# Altium PCB MB672.PCBDOC (part 1 of 4)
Units mil, origin at the board's own origin, x right, y up, seen from the top; angles counter-clockwise.
Board outline 4505 x 6805 mil, 4 copper layers (TopLayer, GND, VCC, BottomLayer); 337 components, 289 nets, 1516 pads, 621 vias.
Unrouted connection lines stored in the file: 28.
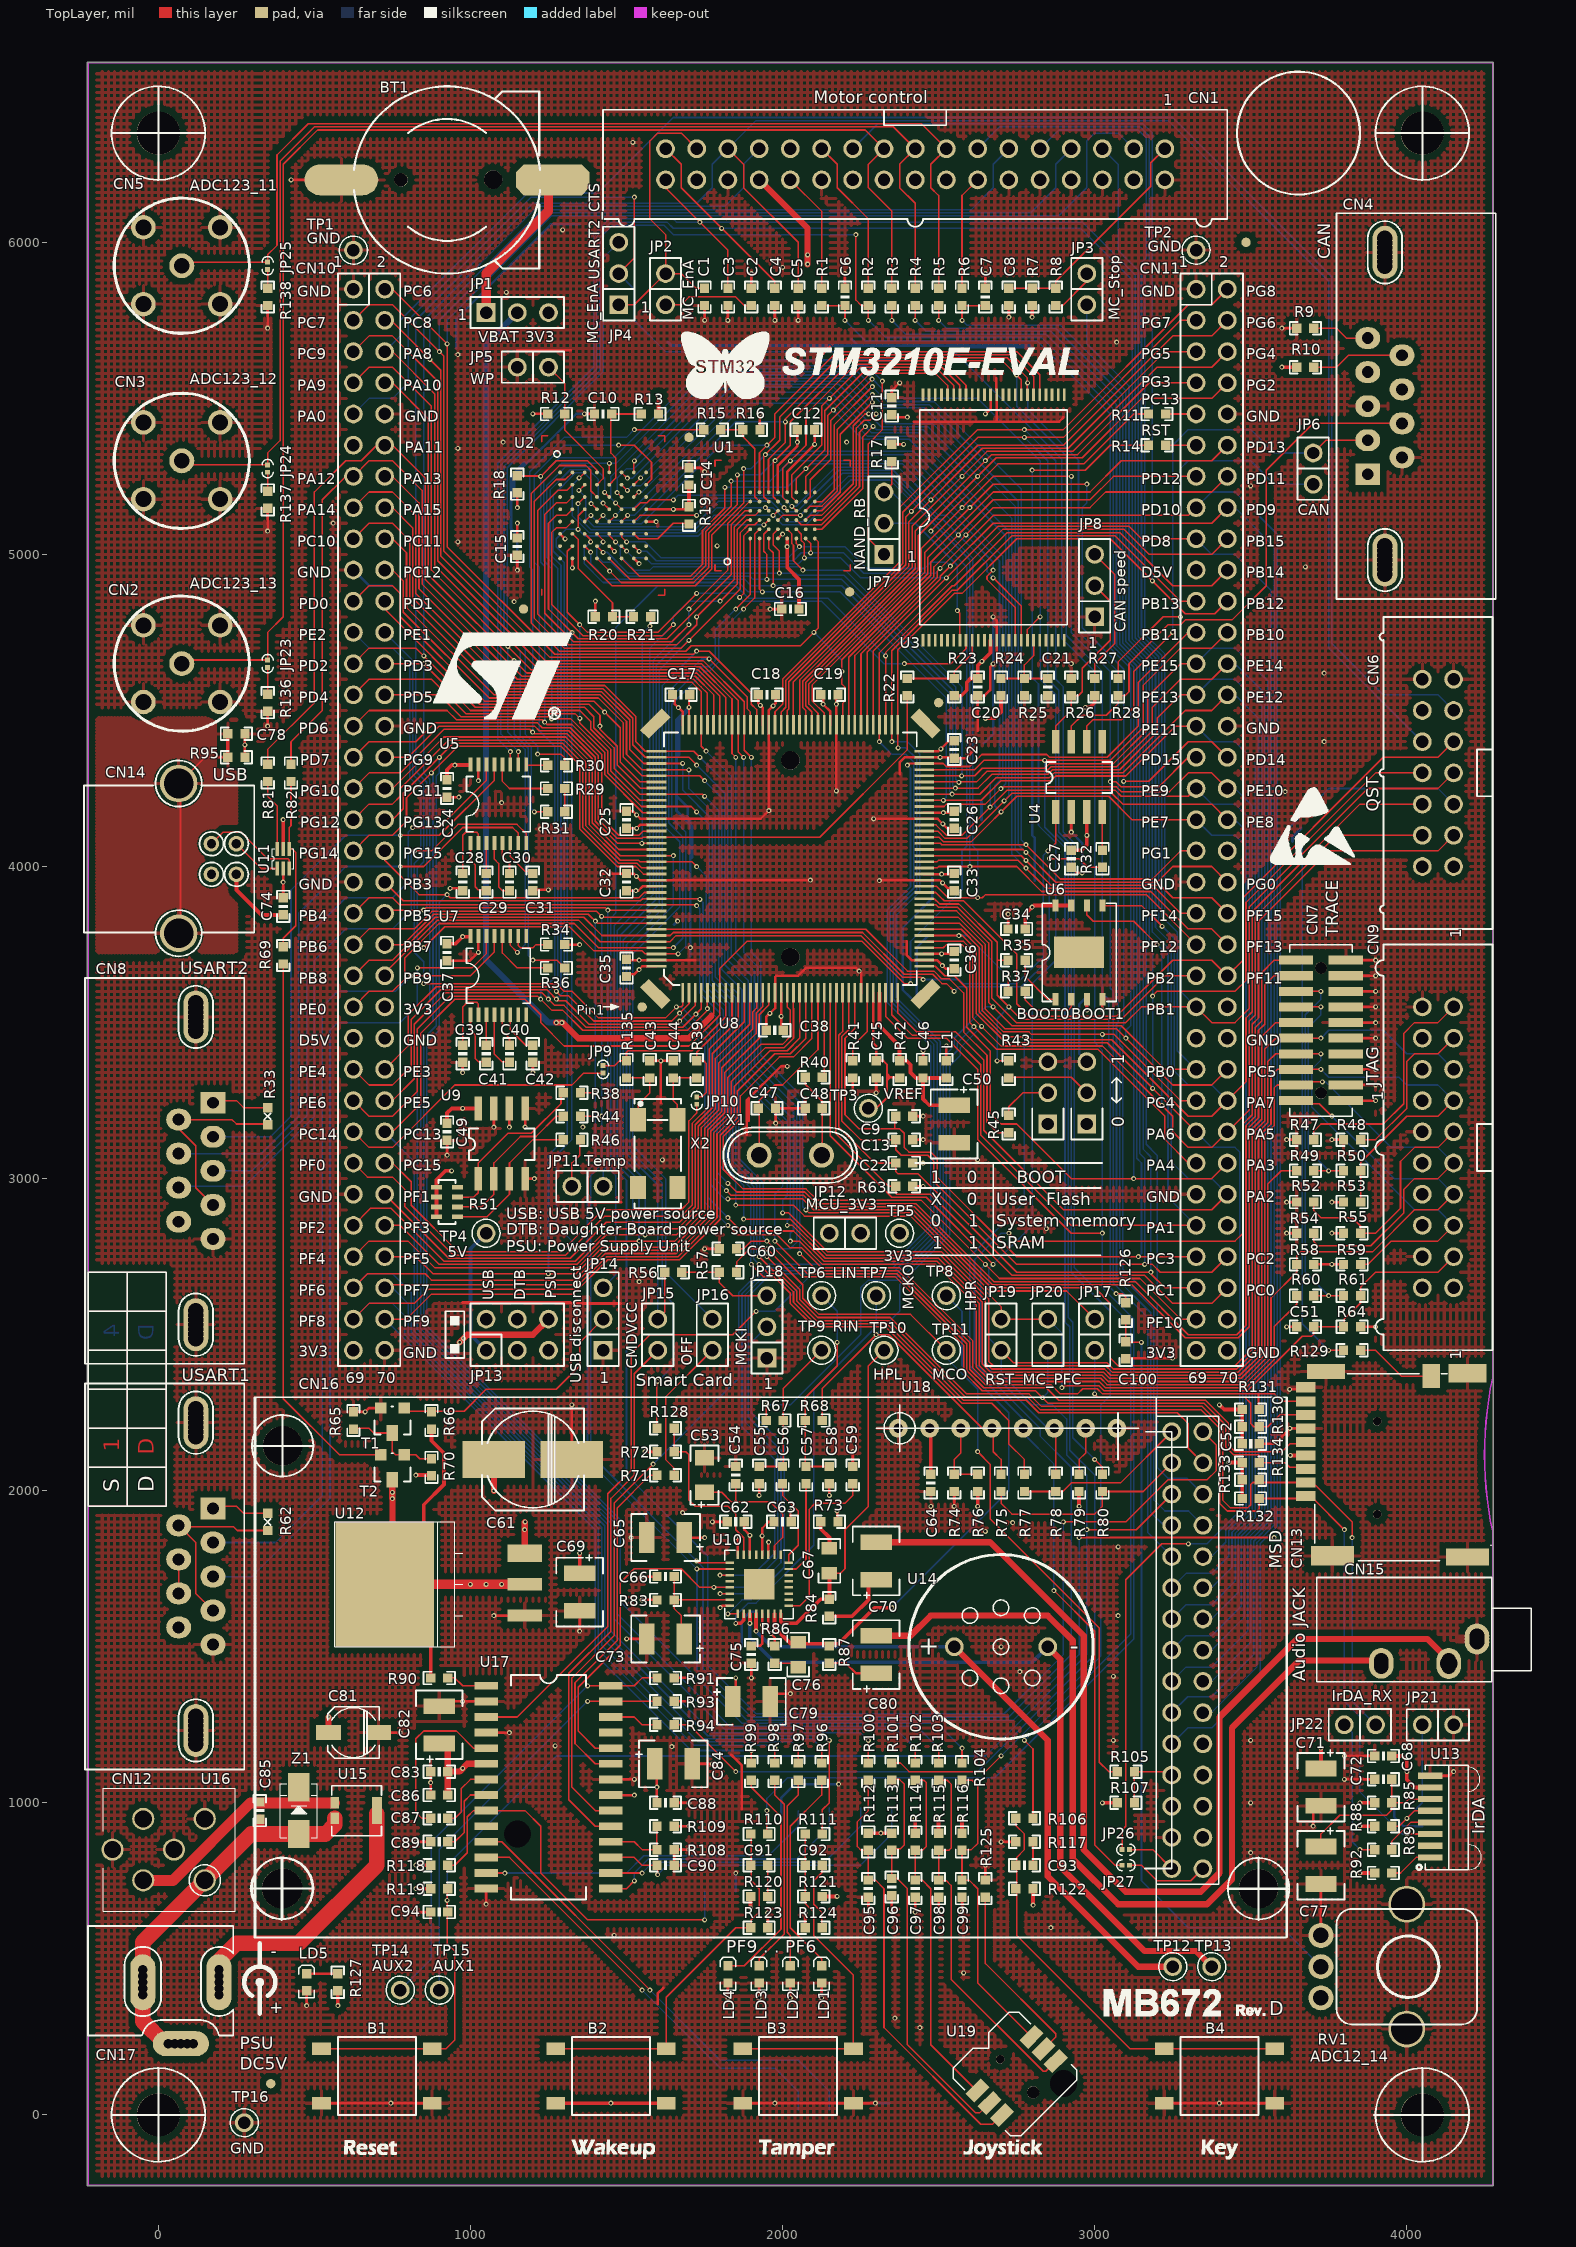
[diagram p0: TopLayer view]
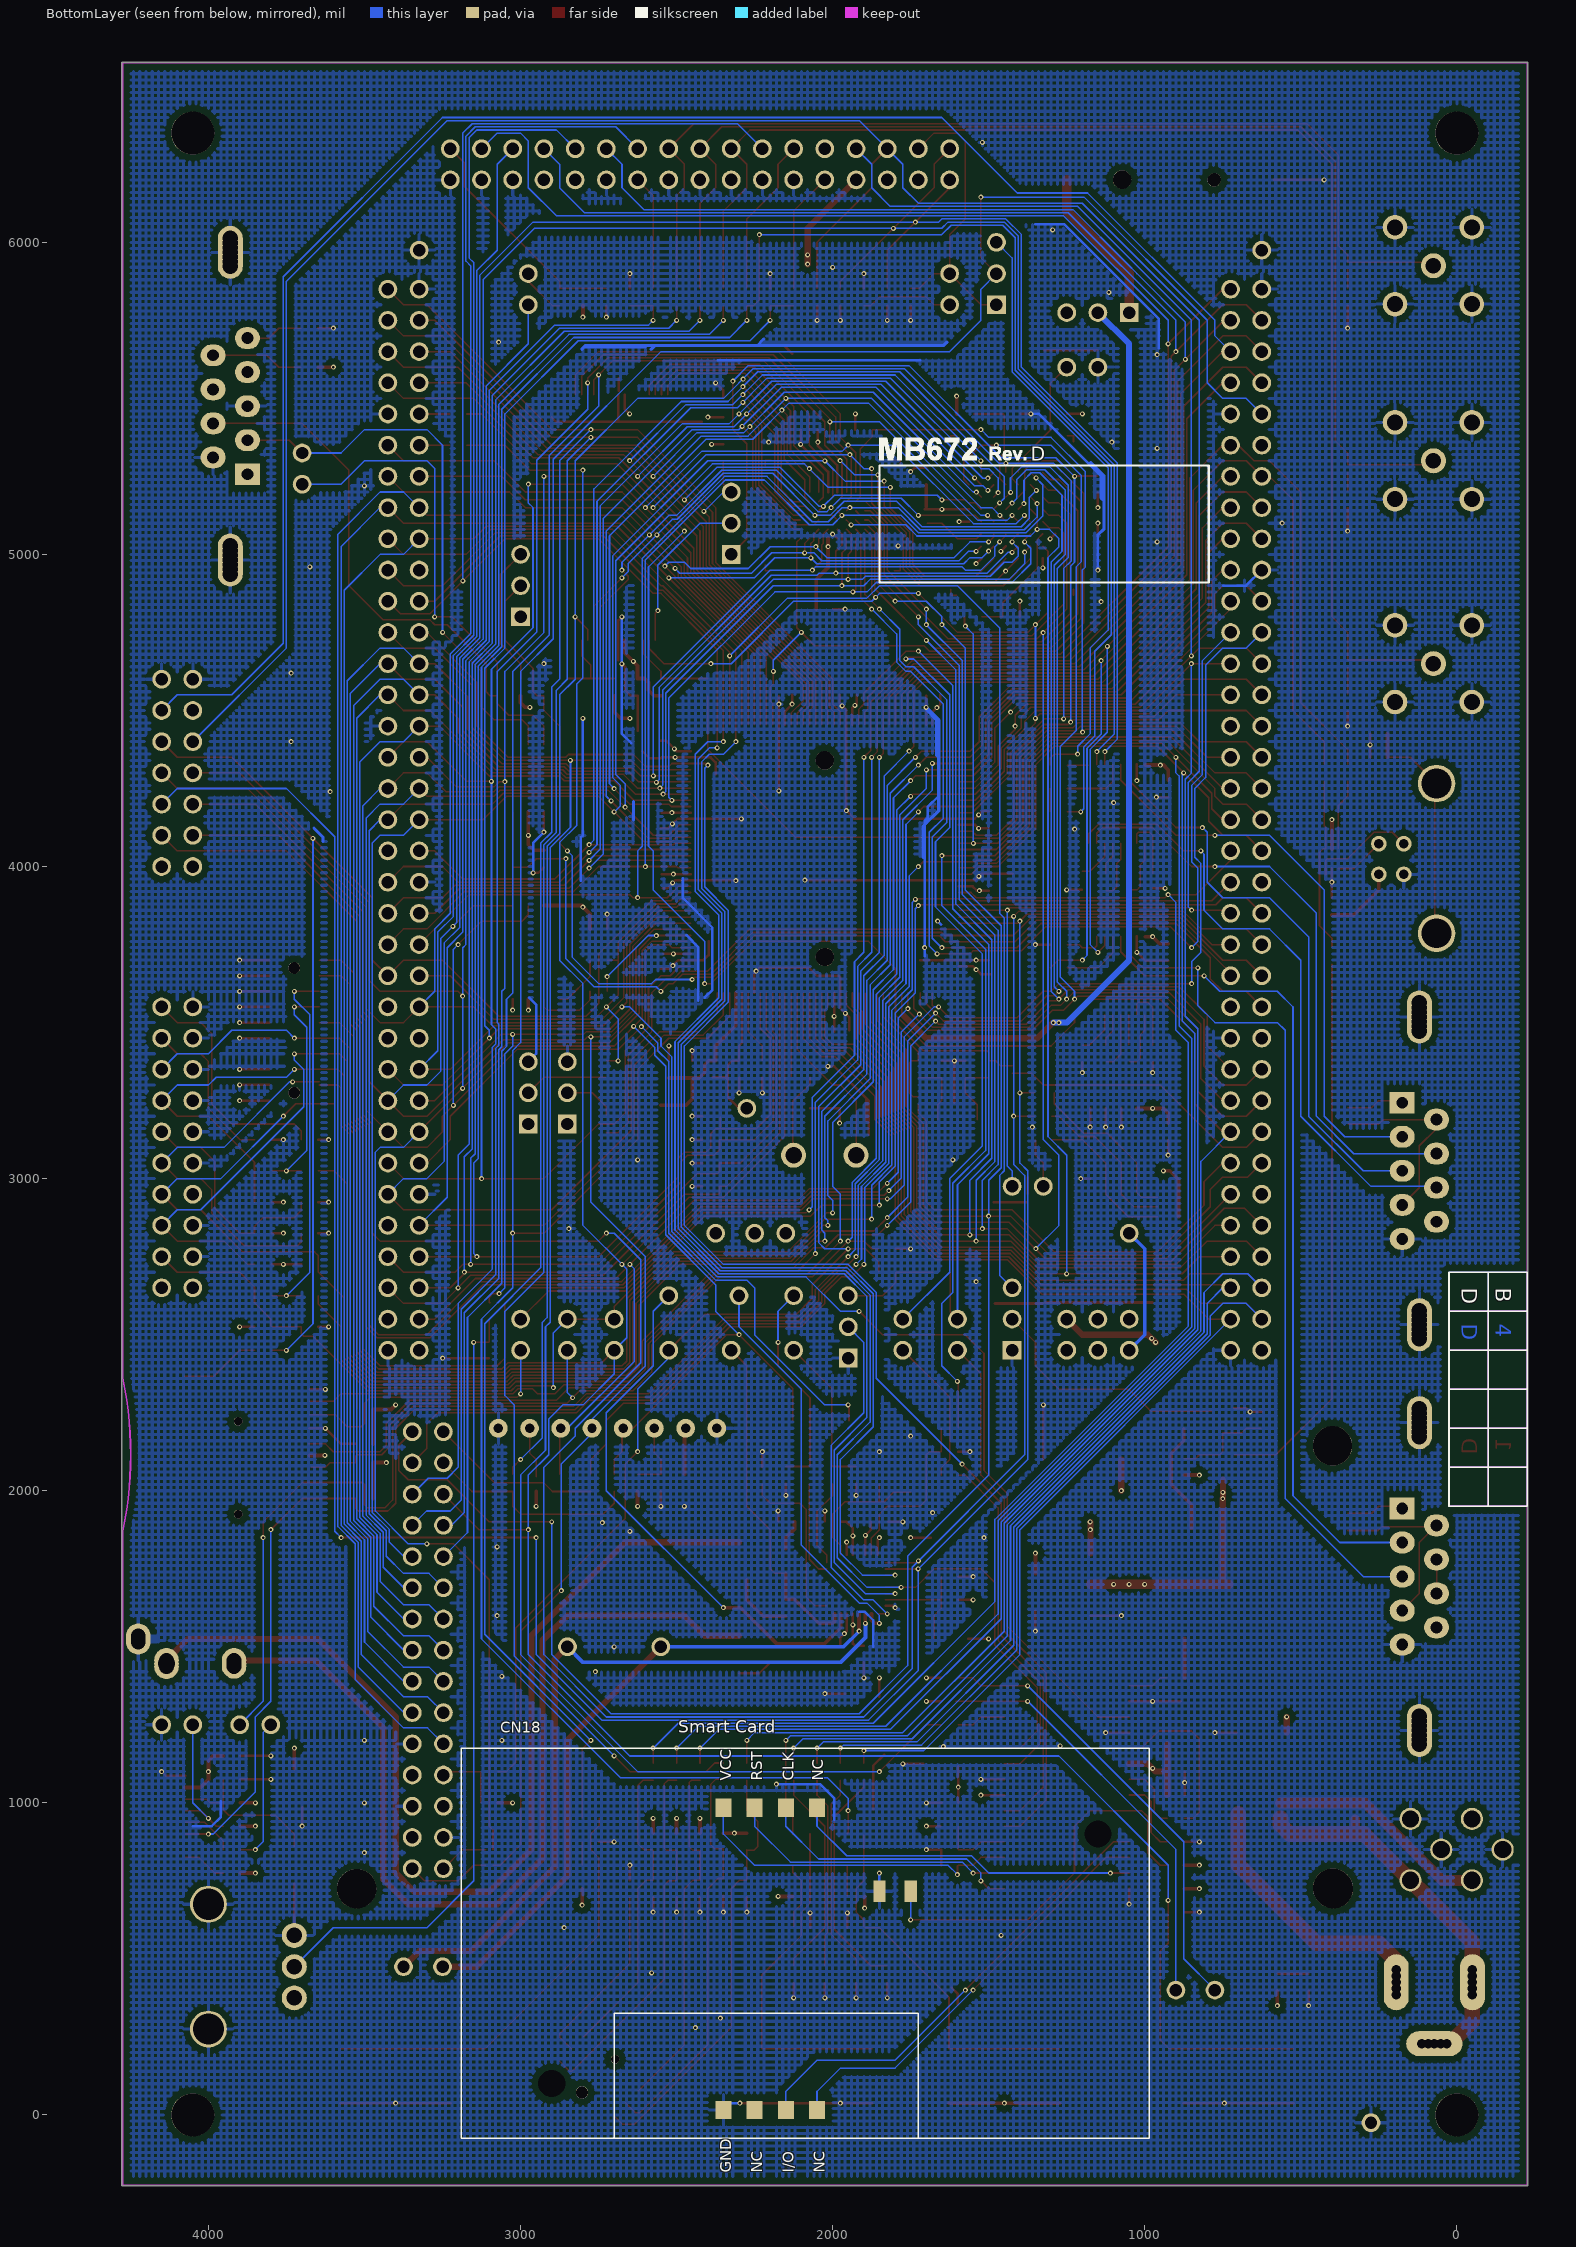
[diagram p1: BottomLayer view, seen from below]
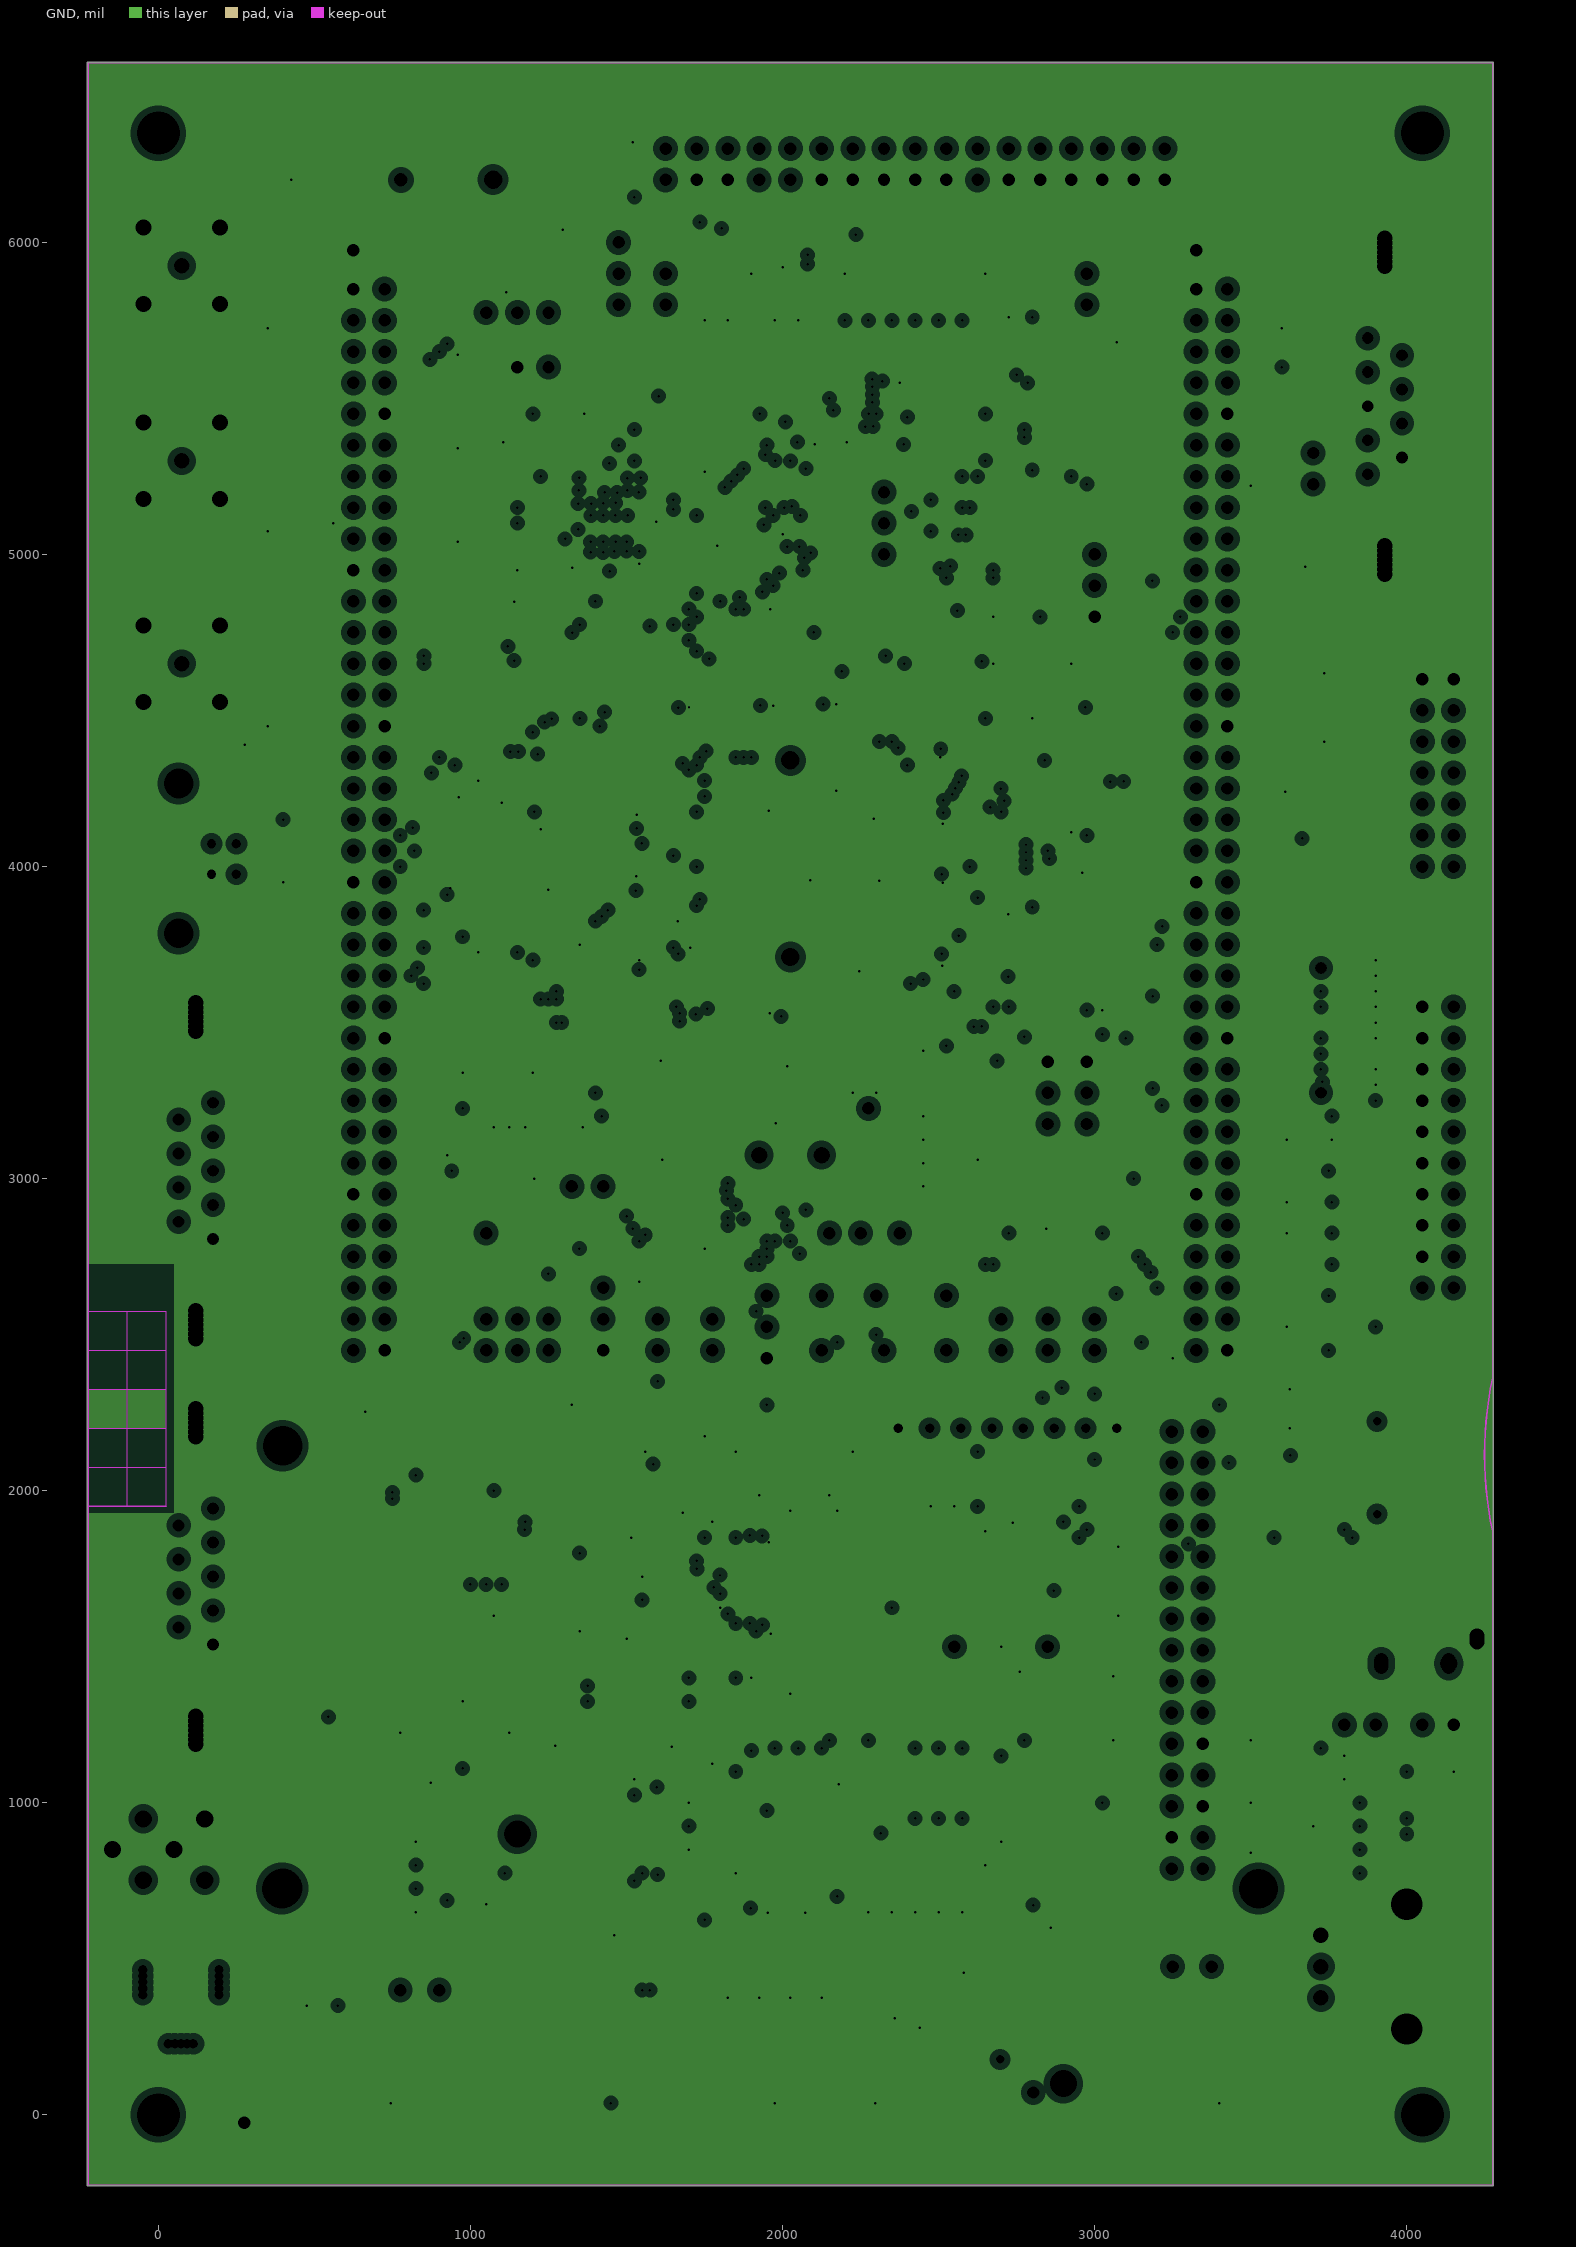
[diagram p2: GND, clearances drawn from the general rule]
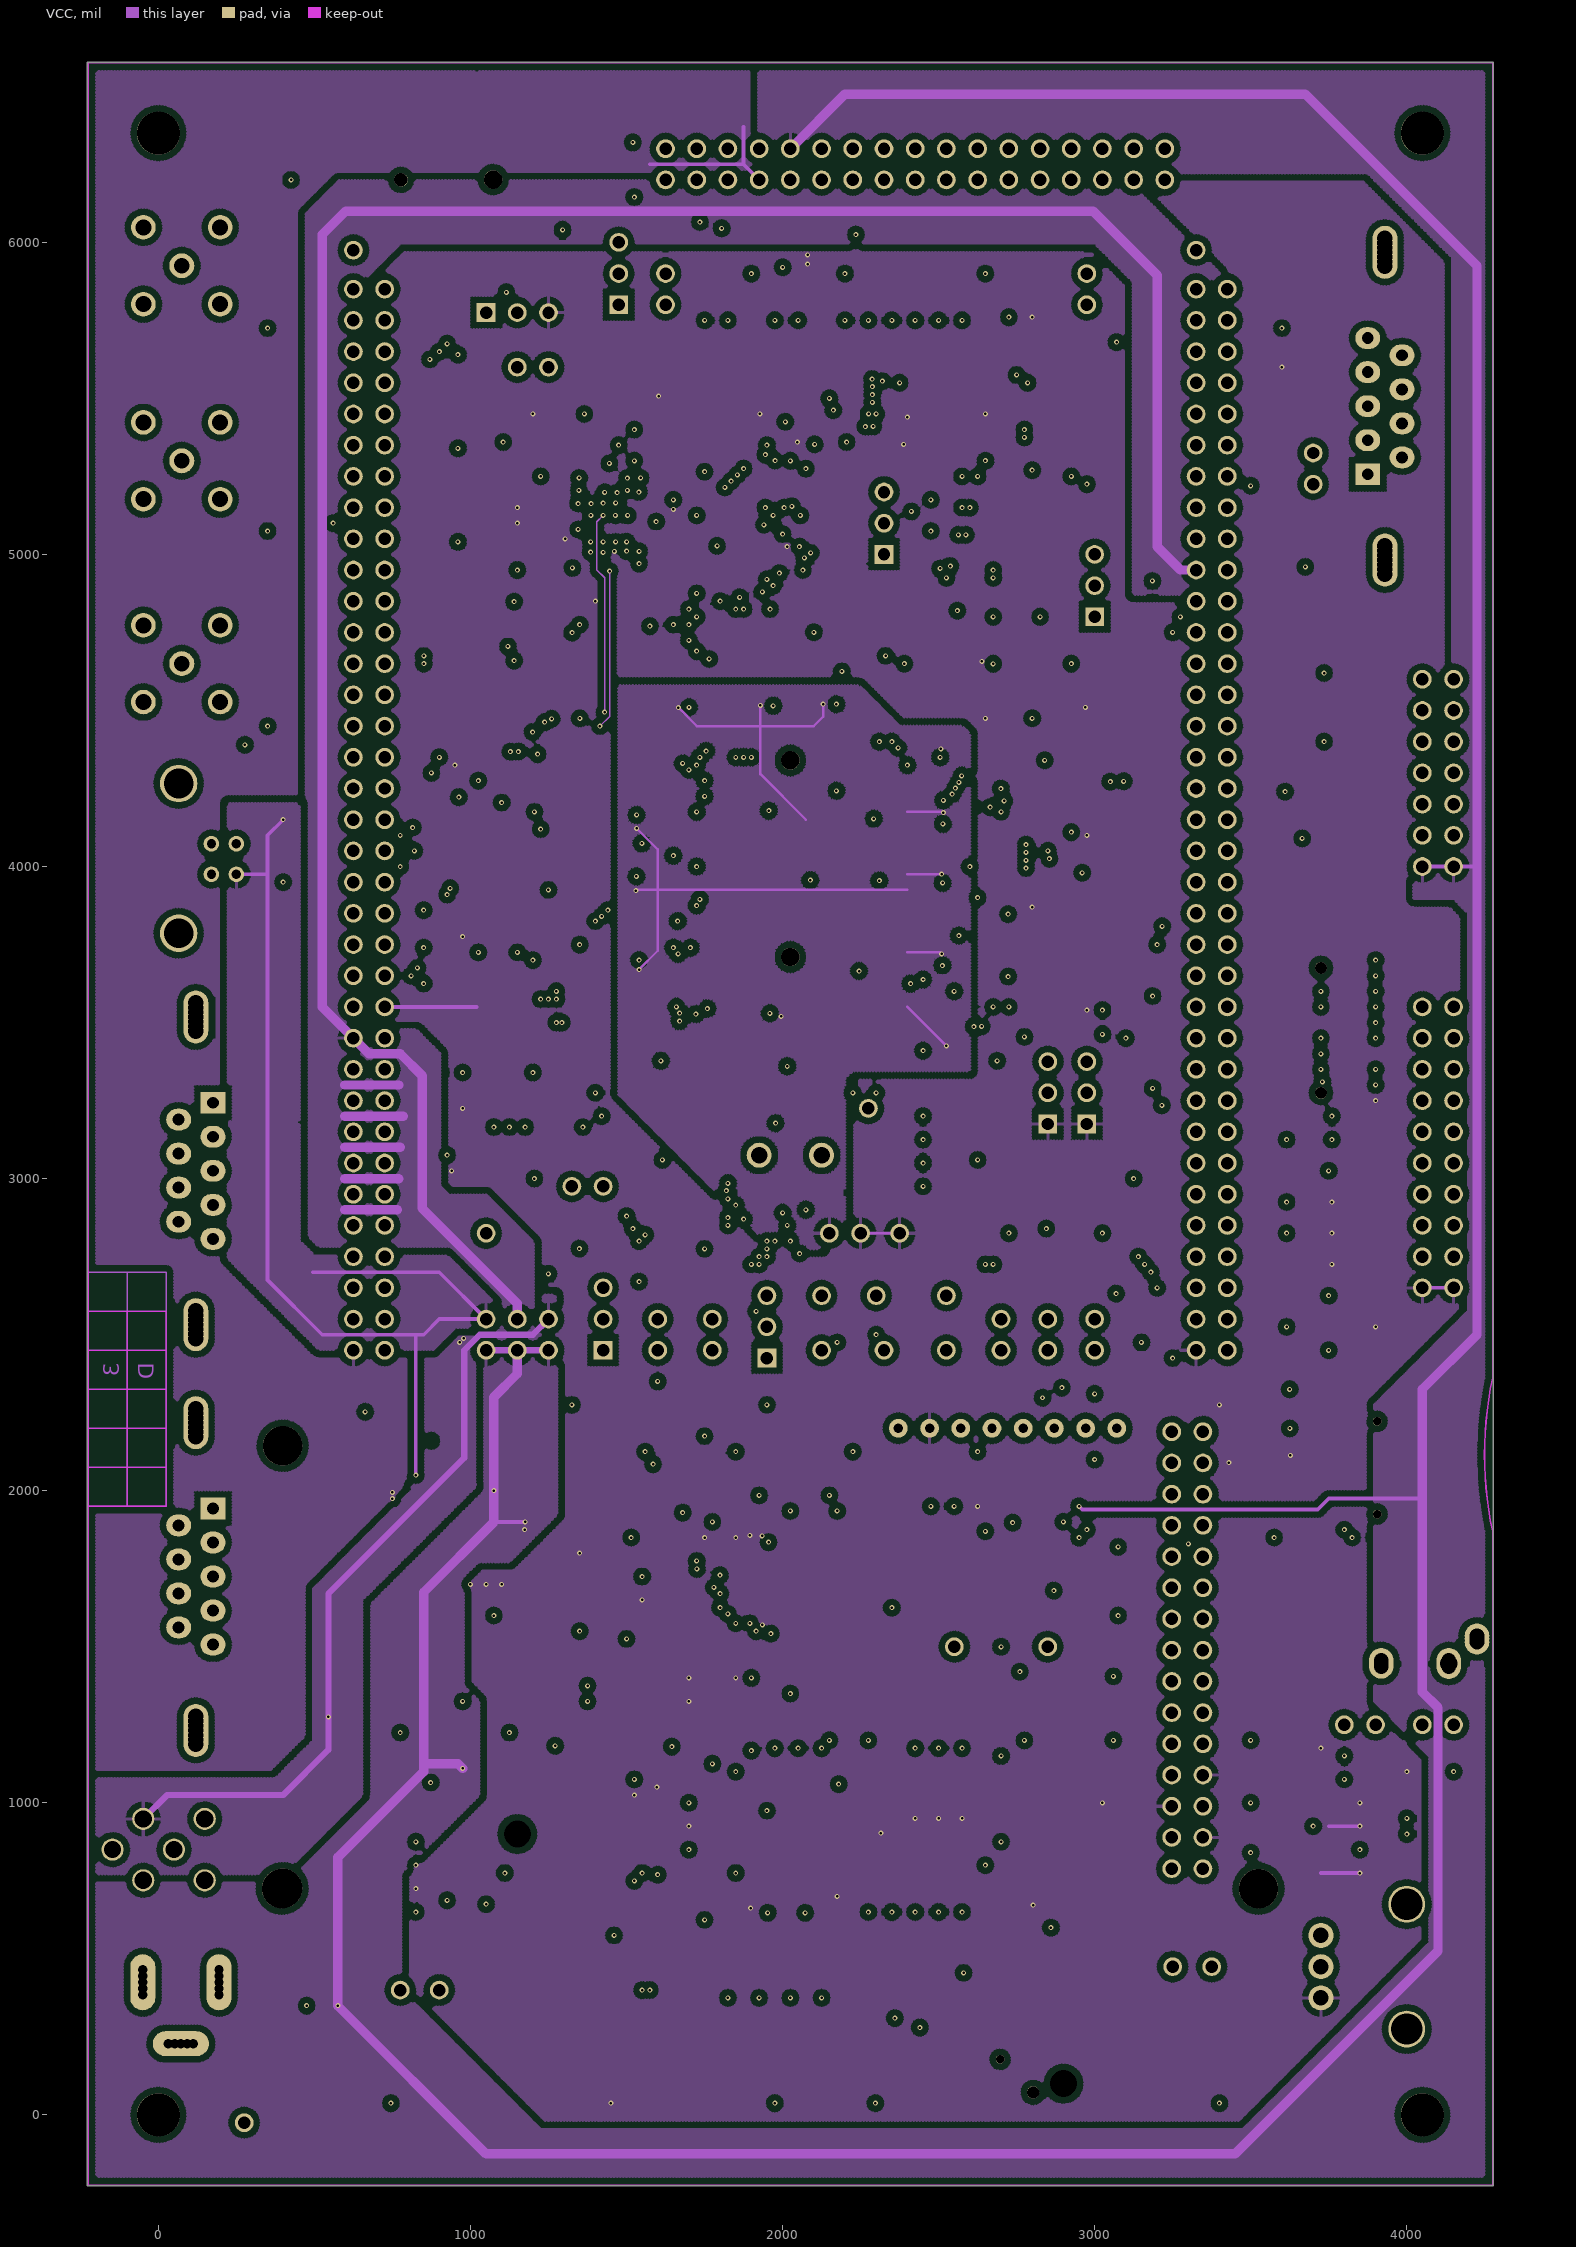
[diagram p3: VCC]

## Layer stack, top to bottom
TopLayer: signal copper 1.4
Dielectric: core 12.6, FR-4, Dk 4.8
GND: plane copper 1.4, net GND
Dielectric: prepreg 12.6, FR-4, Dk 4.8
VCC: signal copper 1.4
Dielectric: core 12.6, FR-4, Dk 4.8
BottomLayer: signal copper 1.4

## Board outline
-227.5,-227.5 4277.5,-227.5 4277.5,6577.5 -227.5,6577.5

## Design rules (kind name [scope] priority, off if disabled: settings)
Clearance Clearance_1 [(InPoly)] p1: gap=20 // Protel DXP Scope 1 Expression Was: (InPoly)   Protel DXP Scope 1 Expression Was: (InPoly)
Clearance [All] p2: gap=5
ComponentClearance [All] p1 off: gap=10 collisioncheckmode=0
PlaneClearance [All] p1: clearance=20
PlaneConnect [All] p1: planeconnectstyle=Relief reliefexpansion=20 reliefentries=4 reliefconductorwidth=10 reliefairgap=10
PolygonConnect [All] p1: connectstyle=Relief reliefconductorwidth=10 reliefentries=4 polygonreliefangle="90 Angle"
RoutingLayers [All] p1: top layer=Horizontal mid layer 1="Not Used" bottom layer=Vertical
RoutingVias [All] p1: holewidth=8 width=16 viastyle="Through Hole" minholewidth=5 minwidth=8 maxholewidth=28 maxwidth=50
SolderMaskExpansion [All] p1: expansion=4
TestPointUsage [All] p1: valid=0 allowmultiple=FALSE
Testpoint [All] p1: side=15 testpointundercomponent=TRUE minsize=40 maxsize=100 preferedsize=60 minholesize=20 maxholesize=40 preferedholesize=32 testpointgrid=1 style=1023 order=1234567890
Width Width_3 [InNet('D5V')] p1: maxlimit=300 minlimit=7 preferedwidth=30
Width Width_4 [InNet('E5V')] p2: maxlimit=300 minlimit=7 preferedwidth=20
Width Width_1 [InNet('+3V3')] p3: maxlimit=300 minlimit=7 preferedwidth=12
Width Width_2 [InNet('+5V')] p4: maxlimit=300 minlimit=7 preferedwidth=30
Width Width_7 [InNet('VDD')] p5: maxlimit=300 minlimit=7 preferedwidth=8
Width Width_8 [InNet('VDDA')] p6: maxlimit=300 minlimit=7 preferedwidth=12
Width Width_5 [InNet('GND')] p7: maxlimit=300 minlimit=7 preferedwidth=10
Width Width_6 [InNet('U5V')] p8: maxlimit=300 minlimit=7 preferedwidth=12
Width [All] p9: maxlimit=300 minlimit=5 preferedwidth=5
14 further rules are at their usual default settings.

## Classes and differential pairs
net class A[0..23]: A0 A1 A2 A3 A4 A5 A6 A7 A8 A9 A10 A11 A12 A13 A14 A15 A16 A17 A18 A19 A20 A21 A22 A23 A[0..23]0 A[0..23]1 A[0..23]2 A[0..23]3 A[0..23]4 A[0..23]5 A[0..23]6 A[0..23]7 A[0..23]8 A[0..23]9 A[0..23]10 A[0..23]11 A[0..23]12 A[0..23]13 A[0..23]14 A[0..23]15 A[0..23]16 A[0..23]17 A[0..23]18 A[0..23]19 A[0..23]20 A[0..23]21 A[0..23]22 A[0..23]23
net class D[0..15]: D0 D1 D2 D3 D4 D5 D6 D7 D8 D9 D10 D11 D12 D13 D14 D15 D[0..15]0 D[0..15]1 D[0..15]2 D[0..15]3 D[0..15]4 D[0..15]5 D[0..15]6 D[0..15]7 D[0..15]8 D[0..15]9 D[0..15]10 D[0..15]11 D[0..15]12 D[0..15]13 D[0..15]14 D[0..15]15
net class A[0..25]: A0 A1 A2 A3 A4 A5 A6 A7 A8 A9 A10 A11 A12 A13 A14 A15 A16 A17 A18 A21 A22 A[0..25]0 A[0..25]1 A[0..25]2 A[0..25]3 A[0..25]4 A[0..25]5 A[0..25]6 A[0..25]7 A[0..25]8 A[0..25]9 A[0..25]10 A[0..25]11 A[0..25]12 A[0..25]13 A[0..25]14 A[0..25]15 A[0..25]16 A[0..25]17 A[0..25]18 A[0..25]19 A[0..25]20 A[0..25]21 A[0..25]22 A[0..25]23 A[0..25]24 A[0..25]25 D0 D1 PD3 PG13 PG14
component class MotorCtrl_2: C17 C18 C19 C23 C25 C26 C33 C35 C36 C38 CN6 JP26 R34 R56 R57 R75 R131 R132 R133 R134
component class SRAM&Flash: C10 C20 C21 C24 C62 C63 C75 C88 JP2 JP5 JP6 JP7 R12 R13 R17 R19 R20 R23 R24 U1 U2
component class CFcard: C21 C24 C63 CN14 R12 R13 R17 R20 R26 R32 R35 R37 R38 R126 U1
net class PE[0..15]: A19 A20 A21 A22 A23 NetR73_2 NetR74_2 PE7 PE8 PE9 PE10 PE11 PE12 PE13 PE14 PE15 PE[0..15]0 PE[0..15]1 PE[0..15]2 PE[0..15]3 PE[0..15]4 PE[0..15]5 PE[0..15]6 PE[0..15]7 PE[0..15]8 PE[0..15]9 PE[0..15]10 PE[0..15]11 PE[0..15]12 PE[0..15]13 PE[0..15]14 PE[0..15]15
net class PD[0..15]: NetR72_2 NetR75_2 NetU14_4 NetU14_5 PB14 PD0 PD1 PD2 PD3 PD4 PD5 PD6 PD10 PD11 PD13 PD[0..15]0 PD[0..15]1 PD[0..15]2 PD[0..15]3 PD[0..15]4 PD[0..15]5 PD[0..15]6 PD[0..15]7 PD[0..15]8 PD[0..15]9 PD[0..15]10 PD[0..15]11 PD[0..15]12 PD[0..15]13 PD[0..15]14 PD[0..15]15 PG7
net class PC[0..15]: PC0 PC1 PC2 PC3 PC4 PC5 PC6 PC7 PC8 PC9 PC10 PC11 PC12 PC13 PC14 PC15 PC[0..15]0 PC[0..15]1 PC[0..15]2 PC[0..15]3 PC[0..15]4 PC[0..15]5 PC[0..15]6 PC[0..15]7 PC[0..15]8 PC[0..15]9 PC[0..15]10 PC[0..15]11 PC[0..15]12 PC[0..15]13 PC[0..15]14 PC[0..15]15
net class PB[0..15]: NetU15_5 PB0 PB1 PB2 PB3 PB4 PB5 PB8 PB10 PB11 PB12 PB13 PB14 PB[0..15]0 PB[0..15]1 PB[0..15]2 PB[0..15]3 PB[0..15]4 PB[0..15]5 PB[0..15]6 PB[0..15]7 PB[0..15]8 PB[0..15]9 PB[0..15]10 PB[0..15]11 PB[0..15]12 PB[0..15]13 PB[0..15]14 PB[0..15]15 PG8 TEMPERATURESENSOR_SCL TEMPERATURESENSOR_SDA
net class PA[0..15]: PA0 PA1 PA2 PA3 PA4 PA5 PA6 PA7 PA8 PA9 PA10 PA11 PA12 PA13 PA14 PA15 PA[0..15]0 PA[0..15]1 PA[0..15]2 PA[0..15]3 PA[0..15]4 PA[0..15]5 PA[0..15]6 PA[0..15]7 PA[0..15]8 PA[0..15]9 PA[0..15]10 PA[0..15]11 PA[0..15]12 PA[0..15]13 PA[0..15]14 PA[0..15]15
component class Extension: CN1 CN17 R96 R97
component class JTAG&SWD: CN7 CN9 CN18 JP19 R47 R48 R49 R50 R52 R53 R54 R55 R58 R59 R60 R61 R64
component class MotorCtrl: C5 C28 C37 C51 C60 C61 C64 C92 C93 C97 C98 C99 CN8 JP5 JP20 R9 R15 R56 R81 R82 R93 R98 R101
component class MCU: B1 BOOT0 BOOT1 BT1 C1 C3 C4 C5 C9 C13 C51 C59 C67 C70 C76 C80 JP7 L1 R20 R71 R84 R87 R115 R116 R117 R124 TP10 U10 X1 X2
component class Peripherals: C14 C27 C49 C74 C78 CN3 CN11 CN14 JP6 JP8 JP14 LD2 LD3 LD4 LD5 R9 R10 R11 R15 R26 R27 R28 R32 R35 R37 R38 R44 R46 R51 R56 R59 R65 R66 R69 R70 R93 R95 R96 R97 R98 R99 R101 R105 R107 R109 R119 R126 RV1 T1 T2 TR1 TR2 U4 U6 U9 U11
component class Power: C11 C61 C69 C81 C85 CN17 JP13 LD1 R127 TP4 TP5 TP16 U12 U15 U16 Z1
component class RS232&IrDA: C28 C29 C30 C31 C37 C39 C40 C41 C42 C52 C68 C71 C72 C77 CN8 CN12 JP21 R29 R30 R33 R36 R62 R85 R88 R89 R92 U5 U7 U13
component class Audio: C20 C21 C24 C62 C63 C75 C88 C91 CN4 JP11 JP16 R13 R17 R19 R20 R23 R24 R26 R32 R35 R37 R38 R64 R101 R126 RV2 RV3 TP4 TP5 TP15 TP16 U9 U15 U18 U19
component class LCD&Joystick: B1 B2 B4 C64 C91 C92 C93 C95 C96 C97 C98 C99 R52 R54 R74 R76 R79 R100 R101 R102 R103 R104 R106 R110 R111 R112 R113 R114 R115 R116 R117 R120 R121 R122 R123 R124 R125 U15 U18 U19
component class MC&Extension: C5 C28 C37 C60 C61 C64 C92 C93 C97 C98 C99 CN1 CN8 CN17 JP20 R9 R15 R56 R81 R82 R96 R97 R98 R101
component class SD&SmartCard: C5 C51 C60 C69 C81 C85 CN7 CN12 R33 R53 R60 R62 R85 R88 R92 R110 R112 R114 R123 TP8 TP9 U16
component class Debug: CN5 CN7 CN9 CN18 JP19 R47 R48 R52 R53 R54 R55 R58 R59

## Components (designator, comment, footprint, x,y, rotation, side; value= is the part's Value field where it differs from the comment)
B1 "RESET" PB10 700,125 r90 top
B2 "WKUP" PB10 1450,125 r90 top
B3 "Tamper" PB10 2050,125 r90 top
B4 "USER" PB10 3400,125 r90 top
BOOT0 "" SIP3 2850,3175 r90 top
BOOT1 "" SIP3 2975,3175 r90 top
BT1 "CR1220 holder" LI1220_1 925,6200 r90 top
C1 "do not fit" 0603 1750,5825 r90 top
C2 "10nF" 0603 1900,5825 r270 top
C3 "do not fit" 0603 1825,5825 r90 top
C4 "do not fit" 0603 1975,5825 r90 top
C5 "do not fit" 0603 2050,5825 r90 top
C6 "100nF" 0603P 2200,5825 r270 top
C7 "100nF" 0603P 2650,5825 r270 top
C8 "1nF" 0603 2725,5825 r90 top
C9 "do not fit" 0603 2390,3200 r180 top
C10 "100nF" 0603P 1425,5450 r180 top
C11 "100nF" 0603P 2350,5475 r90 top
C12 "100nF" 0603P 2075,5400 r0 top
C13 "do not fit" 0603 2390,3125 r180 top
C14 "100nF" 0603P 1700,5250 r270 top
C15 "100nF" 0603P 1150,5025 r90 top
C16 "100nF" 0603P 2025,4825 r180 top
C17 "100nF" 0603P 1675,4550 r0 top
C18 "100nF" 0603P 1950,4550 r0 top
C19 "100nF" 0603P 2150,4550 r0 top
C20 "100nF" 0603P 2625,4575 r90 top
C21 "100nF" 0603P 2850,4575 r90 top
C22 "do not fit" 0603 2390,3050 r180 top
C23 "100nF" 0603p 2550,4375 r270 top
C24 "100nF" 0603P 925,4250 r90 top
C25 "100nF" 0603P 1500,4150 r90 top
C26 "100nF" 0603P 2550,4150 r270 top
C27 "100nF" 0603P 2925,4025 r90 top
C28 "100nF" 0603P 975,3950 r90 top
C29 "100nF" 0603P 1050,3950 r90 top
C30 "100nF" 0603P 1125,3950 r90 top
C31 "100nF" 0603P 1200,3950 r90 top
C32 "100nF" 0603P 1500,3950 r90 top
C33 "100nF" 0603P 2550,3950 r270 top
C34 "100nF" 0603P 2750,3800 r0 top
C35 "100nF" 0603P 1500,3675 r90 top
C36 "100nF" 0603P 2550,3700 r270 top
C37 "100nF" 0603P 925,3725 r270 top
C38 "100nF" 0603p 1975,3475 r180 top
C39 "100nF" 0603P 975,3400 r90 top
C40 "100nF" 0603P 1125,3400 r90 top
C41 "100nF" 0603P 1050,3400 r90 top
C42 "100nF" 0603P 1200,3400 r90 top
C43 "10pF" 0603 1575,3350 r90 top
C44 "10pF" 0603 1650,3350 r90 top
C45 "10nF" 0603 2300,3350 r270 top
C46 "10nF" 0603 2450,3350 r270 top
C47 "20pF" 0603 1950,3225 r0 top
C48 "20pF" 0603 2100,3225 r180 top
C49 "100nF" 0603P 925,3150 r90 top
C50 "10uF" TAN-B 2550,3175 r270 top
C51 "do not fit" 0603 3675,2525 r0 top
C52 "100nF" 0603P 3500,2150 r0 top
C53 "2.2uF" TAN-A 1750,2050 r90 top
C54 "100nF" 0603P 1850,2050 r90 top
C55 "do not fit" 0603 1925,2050 r90 top
C56 "1uF" 0603 2000,2050 r90 top
C57 "1uF" 0603 2075,2050 r90 top
C58 "do not fit" 0603 2150,2050 r90 top
C59 "1uF" 0603 2225,2050 r90 top
C60 "do not fit" 0603 1825,2775 r0 top
C61 "220uF" C310M 1200,2100 r180 top
C62 "100nF" 0603P 1850,1900 r0 top
C63 "100nF" 0603P 2000,1900 r180 top
C64 "100nF" 0603P 2475,2025 r270 top
C65 "10uF" TAN-B 1625,1850 r180 top
C66 "100nF" 0603P 1625,1725 r180 top
C67 "0.22uF" 0805 2150,1775 r180 top
C68 "0.1uF" 0603P 3925,1150 r180 top
C69 "47uF" TAN-B 1350,1675 r270 top
C70 "47uF" TAN-B 2300,1775 r90 top
C71 "4.7uF" TAN-B 3725,1050 r270 top
C72 "0.1uF" 0603P 3925,1075 r180 top
C73 "10uF" TAN-B 1625,1525 r180 top
C74 "100nF" 0603P 400,3872.5 r270 top
C75 "100nF" 0603P 1900,1475 r90 top
C76 "0.22uF" 0805 2050,1475 r0 top
C77 "4.7uF" TAN-B 3725,800 r270 top
C78 "4.7nF" 0603 250,4425 r180 top
C79 "10uF" TAN-B 1900,1325 r0 top
C80 "47uF" TAN-B 2300,1475 r90 top
C81 "10uF" C160M 625,1225 r180 top
C82 "47uF" TAN-B 900,1250 r90 top
C83 "100nF" 0603P 900,1100 r180 top
C84 "47uF" TAN-B 1650,1125 r0 top
C85 "100nF" 0603P 325,975 r270 top
C86 "330nF" 0603 900,1025 r180 top
C87 "100nF" 0603P 900,950 r180 top
C88 "100nF" 0603p 1625,1000 r180 top
C89 "100nF" 0603P 900,875 r180 top
C90 "100nF" 0603P 1625,800 r180 top
C91 "do not fit" 0603 1925,800 r180 top
C92 "100nF" 0603P 2100,800 r180 top
C93 "100nF" 0603P 2775,800 r180 top
C94 "100nF" 0603P 900,650 r0 top
C95 "100nF" 0603P 2275,725 r90 top
C96 "100nF" 0603P 2350,730 r90 top
C97 "100nF" 0603P 2425,725 r90 top
C98 "100nF" 0603P 2500,725 r90 top
C99 "100nF" 0603P 2575,725 r90 top
C100 "10nF" 0603 3100,2450 r90 top
CN1 "MC_connector" IDC34S 3225,6300 r270 top locked
CN2 "VB334" VB334 75,4650 r0 top
CN3 "VB334" VB334 75,5300 r270 top
CN4 "DB9-male CAN connector" DB9/M 3875,5475 r270 top
CN5 "VB334" VB334 75,5925 r0 top
CN6 "Header 7X2" IDC14S 4150,4000 r180 top
CN7 "FTSH-110-01-L-DV" FTSH-110-01-L-DV 3725,3475 r90 top
CN8 "DB9-male USART2" DB9/M 175,3025 r90 top
CN9 "JTAG" IDC20S 4150,2650 r180 top locked
CN10 "Header 35X2" 2*35P 625,5850 r0 top locked
CN11 "Header 35X2" 2*35P 3325,5850 r0 top locked
CN12 "DB9-male USART1" DB9/M 175,1725 r90 top
CN13 "PJS008-2000" MSD(PJS008) 3905,1925 r0 top
CN14 "USB-typeB connector" USB-B 250,3975 r270 top
CN15 "ST-225-02" ST-225-02 4225,1525 r180 top
CN16 "Connector to Mother board" AM240*320B 3525,725 r0 top
CN17 "DC-10B" DC10B -50,425 r0 top
CN18 "C816" SAM(C816) 2025,500 r270 bottom
JP1 "" SIP3 1050,5775 r0 top
JP2 "" SIP2 1625,5900 r270 top
JP3 "" SIP2 2975,5800 r90 top
JP4 "" SIP3 1475,5800 r90 top
JP5 "" SIP2 1150,5600 r0 top
JP6 "" SIP2 3700,5225 r90 top
JP7 "" SIP3 2325,5000 r90 top
JP8 "" SIP3 3000,4800 r90 top
JP9 "" JP2_SMD 1425,3350 r270 top
JP10 "" JP2_SMD 1725,3250 r90 top
JP11 "" SIP2 1425,2975 r180 top
JP12 "" SIP2 2150,2825 r0 top
JP13 "" 2*3P 1050,2450 r90 top
JP14 "" SIP3 1425,2450 r90 top
JP15 "" SIP2 1600,2550 r270 top
JP16 "" SIP2 1775,2550 r270 top
JP17 "" SIP2 3000,2550 r270 top
JP18 "" SIP3 1950,2425 r90 top
JP19 "" SIP2 2700,2550 r270 top
JP20 "" SIP2 2850,2450 r90 top
JP21 "" SIP2 4050,1250 r0 top
JP22 "" SIP2 3900,1250 r180 top
JP23 "" JP2_SMD 350,4650 r270 top
JP24 "" JP2_SMD 350,5275 r270 top
JP25 "" JP2_SMD 350,5925 r270 top
JP26 "" JP2_SMD 3100,850 r0 top
JP27 "" JP2_SMD 3100,800 r0 top
L1 "BEAD" 0603 2525,3350 r90 top
LD1 "Green" D0603 2125,450 r0 top
LD2 "Orange" D0603 2025,450 r0 top
LD3 "Red" D0603 1925,450 r0 top
LD4 "Blue" D0603 1825,450 r0 top
LD5 "red" D0603 475,425 r0 top
R1 "0" 0603 2125,5825 r270 top
R2 "do not fit" 0603 2275,5825 r90 top
R3 "0" 0603 2350,5825 r90 top
R4 "0" 0603 2425,5825 r90 top
R5 "0" 0603 2500,5825 r90 top
R6 "0" 0603 2575,5825 r270 top
R7 "3.3K" 0603 2800,5825 r270 top
R8 "0" 0603 2875,5825 r270 top
R9 "0" 0603 3675,5725 r0 top
R10 "do not fit" 0603 3675,5600 r0 top
R11 "820" 0603 3200,5450 r0 top
R12 "10K" 0603 1275,5450 r0 top
R13 "10K" 0603 1575,5450 r0 top
R14 "820" 0603 3200,5350 r180 top
R15 "0" 0603 1775,5400 r0 top
R16 "10K" 0603 1900,5400 r180 top
R17 "10K" 0603 2350,5325 r90 top
R18 "10K" 0603 1150,5225 r270 top
R19 "10K" 0603 1700,5125 r270 top
R20 "10K" 0603 1427.5,4800 r180 top
R21 "0" 0603 1550,4800 r180 top
R22 "0" 0603 2400,4575 r90 top
R23 "10K" 0603 2550,4575 r270 top
R24 "10K" 0603 2700,4575 r90 top
R25 "do not fit" 0603 2775,4575 r270 top
R26 "10K" 0603 2925,4575 r90 top
R27 "0" 0603 3000,4575 r270 top
R28 "120" 0603 3075,4575 r90 top
R29 "0" 0603 1275,4250 r0 top
R30 "0" 0603 1275,4325 r0 top
R31 "0" 0603 1275,4175 r0 top
R32 "0" 0603 3025,4025 r270 top
R33 "do not fit" 0603_NC 350,3200 r90 top
R34 "10K" 0603 1275,3750 r0 top
R35 "0" 0603 2750,3700 r180 top
R36 "0" 0603 1275,3675 r0 top
R37 "0" 0603 2750,3600 r0 top
R38 "0" 0603 1325,3275 r0 top
R39 "0" 0603 1725,3350 r90 top
R40 "390" 0603 2100,3325 r180 top
R41 "0" 0603 2225,3350 r270 top
R42 "47" 0603 2375,3350 r90 top
R43 "10K" 0603 2725,3350 r270 top
R44 "0" 0603 1325,3200 r0 top
R45 "10K" 0603 2725,3175 r90 top
R46 "0" 0603 1325,3125 r0 top
R47 "10K" 0603 3675,3125 r180 top
R48 "10K" 0603 3825,3125 r180 top
R49 "0" 0603 3675,3025 r180 top
R50 "do not fit" 0603 3825,3025 r0 top
R51 "4K7" RES4B 925,2925 r90 top
R52 "10K" 0603 3675,2925 r0 top
R53 "10K" 0603 3825,2925 r180 top
R54 "10K" 0603 3675,2825 r0 top
R55 "do not fit" 0603 3825,2825 r180 top
R56 "0" 0603 1650,2700 r180 top
R57 "do not fit" 0603 1825,2700 r0 top
R58 "10K" 0603 3675,2725 r0 top
R59 "10K" 0603 3825,2725 r180 top
R60 "0" 0603 3675,2625 r180 top
R61 "do not fit" 0603 3825,2625 r0 top
R62 "do not fit" 0603_NC 350,1900 r90 top
R63 "100K" 0603 2390,2975 r180 top
R64 "10K" 0603 3825,2525 r0 top
R65 "36K" 0603 625,2225 r90 top
R66 "47K" 0603 875,2225 r270 top
R67 "0" 0603 1975,2225 r180 top
R68 "0" 0603 2100,2225 r0 top
R69 "1.5K" 0603 400,3715 r90 top
R70 "10K" 0603 875,2075 r90 top
R71 "0" 0603 1625,2050 r180 top
R72 "10K" 0603 1625,2125 r180 top
R73 "10" 0603 2150,1900 r0 top
R74 "do not fit" 0603 2550,2025 r90 top
R75 "do not fit" 0603 2700,2025 r90 top
R76 "do not fit" 0603 2625,2025 r270 top
R77 "0" 0603 2775,2025 r270 top
R78 "do not fit" 0603 2875,2025 r270 top
R79 "0" 0603 2950,2025 r90 top
R80 "0" 0603 3025,2025 r270 top
R81 "0" 0603 350,4300 r270 top
R82 "0" 0603 425,4300 r270 top
R83 "10" 0603 1625,1650 r180 top
R84 "6.8" 0603 2150,1625 r90 top
R85 "47" 0603 3925,1000 r0 top
R86 "10" 0603 1975,1475 r90 top
R87 "6.8" 0603 2150,1475 r90 top
R88 "10K" 0603 3925,925 r180 top
R89 "0" 0603 3925,850 r180 top
R90 "4K7" 0603 900,1400 r0 top
R91 "10K" 0603 1625,1400 r180 top
R92 "5" 0603 3925,775 r0 top
R93 "10K" 0603 1625,1325 r180 top
R94 "0" 0603 1625,1250 r0 top
R95 "1M" 0603 250,4350 r180 top
R96 "600" 0603 2125,1100 r90 top
R97 "600" 0603 2050,1100 r90 top
R98 "600" 0603 1975,1100 r90 top
R99 "600" 0603 1900,1100 r90 top
R100 "0" 0603 2275,1100 r90 top
R101 "0" 0603 2350,1100 r90 top
R102 "0" 0603 2425,1100 r90 top
R103 "0" 0603 2500,1100 r90 top
R104 "0" 0603 2575,1100 r90 top
R105 "do not fit" 0603 3100,1100 r180 top
R106 "0" 0603 2775,950 r0 top
R107 "0" 0603 3100,1000 r180 top
R108 "10K" 0603 1625,850 r0 top
R109 "10K" 0603 1625,925 r180 top
R110 "330" 0603 1925,900 r0 top
R111 "0" 0603 2100,900 r0 top
R112 "10K" 0603 2275,875 r90 top
R113 "10K" 0603 2350,875 r270 top
R114 "10K" 0603 2425,875 r90 top
R115 "10K" 0603 2500,875 r90 top
R116 "10K" 0603 2575,875 r90 top
R117 "100" 0603 2775,875 r0 top
R118 "100K" 0603 900,800 r0 top
R119 "10K" 0603 900,725 r180 top
R120 "100" 0603 1925,700 r0 top
R121 "4K7" 0603 2100,700 r0 top
R122 "4K7" 0603 2775,725 r0 top
R123 "220K" 0603 1925,600 r0 top
R124 "100" 0603 2100,600 r0 top
R125 "100" 0603 2650,725 r270 top
R126 "0" 0603 3100,2575 r270 top
R127 "300" 0603 575,425 r270 top
R128 "0" 0603 1625,2200 r180 top
R129 "0" 0603 3825,2450 r0 top
R130 "47K" 0603 3500,2205 r0 top
R131 "47K" 0603 3500,2260 r0 top
R132 "47K" 0603 3500,1975 r0 top
R133 "47K" 0603 3500,2035 r0 top
R134 "47K" 0603 3500,2090 r0 top
R135 "0" 0603 1500,3350 r90 top
R136 "50" 0603 350,4525 r270 top
R137 "50" 0603 350,5175 r270 top
R138 "50" 0603 350,5825 r270 top
RV1 "10K" ADJRH 3725,475 r270 top
T1 "9013" SOT-23 750,2225 r180 top
T2 "9013" SOT-23 750,2075 r180 top
TP1 "Ground" TP 625,5975 r0 top
TP2 "Ground" TP 3325,5975 r0 top
TP3 "VREF" TP 2275,3225 r180 top
TP4 "5V" TP 1050,2825 r180 top
TP5 "3V3" TP 2375,2825 r0 top
TP6 "LIN" TP 2125,2625 r0 top
TP7 "MCKO" TP 2300,2625 r0 top
TP8 "HPR" TP 2525,2625 r0 top
TP9 "RIN" TP 2125,2450 r270 top
TP10 "HPL" TP 2325,2450 r0 top
TP11 "MCO" TP 2525,2450 r0 top
TP12 "SPP" TP 3250,475 r0 top
TP13 "SPN" TP 3375,475 r0 top
TP14 "AUX2" TP 775,400 r0 top
TP15 "AUX1" TP 900,400 r90 top
TP16 "Ground" TP 275,-25 r180 top
U1 "IS61WV51216BLL-10MLI" FBGA48(9*11) 2000,5125 r90 top
U2 "M29W128FL70ZA6E" TBGA64(10*13) 1425,5125 r0 top
U3 "NAND512W3A2CN6E" TSOP48 2450,4725 r90 top
U4 "SN65HVD230" SO8 2875,4175 r0 top
U5 "ST3232ECTR" TSSOP16 1000,4075 r90 top
U6 "M25P64-VME6G" VDFPN8(8*6) 2950,3725 r90 top
U7 "ST3232ECTR" TSSOP16 1000,3525 r90 top
U8 "STM32F103ZET6" IC149-144-045-B5 2025,4025 r0 top locked
U9 "STLM75M2E" SO8 1025,3000 r0 top
U10 "AK4343" QFN32 1925,1700 r270 top
U11 "USBLC6-2P6" SOT-666 400,4025 r90 top
U12 "LD1086D2M33" D2PAK/A 725,1700 r0 top
U13 "TFDU4300" IR_VISHAY3 4075,825 r0 top
U14 "KSS-1508" KS1508 2700,1500 r0 top
U15 "ZEN056V130A24LS" polyzen 700,975 r180 top
U16 "BNX002-01" BNX001 50,850 r180 top
U17 "ST8024CDR" SO28 1050,1375 r0 top
U18 "HXM122032-GB1 (do not fit)" LCD12232-GB1 3525,725 r0 top
U19 "MT008-A" JOY 2750,125 r45 top
X1 "8MHz (with socket)" XTAL_socket 2025,3075 r0 top
X2 "MC306-G-06Q-32.768 (manufacturer JFVNY)" SM8 1600,3080 r270 top
Z1 "SMAJ5.0A-TR" 1R1C 450,975 r0 top

## Footprints (in the part's own frame and the unit in brackets; to place one, negate y for a bottom-side part, rotate by r counter-clockwise, add the part's x,y. Pads: shape width x height; smd on the part's side, far side on the other; paste and mask are expansions set on the pad)
1R1C [mm]
  rect 1.75x2.3 smd: 1(0,-1.9) 2(0,1.9)
  silkscreen extent -1.5,-2.2 1.5,2.2
2*3P [mil]
  round 60 hole 40: 1(0,0) 2(100,0) 3(0,-100) 4(100,-100) 5(0,-200) 6(100,-200)
  silkscreen extent -50,-250 150,50
2*35P [mil]
  round 60 hole 40: 1(0,0) 2(100,0) 3(0,-100) 4(100,-100) 5(0,-200) 6(100,-200) 7(0,-300) 8(100,-300) 9(0,-400) 10(100,-400) 11(0,-500) 12(100,-500) 13(0,-600) 14(100,-600) 15(0,-700) 16(100,-700) 17(0,-800) 18(100,-800) 19(0,-900) 20(100,-900) 21(0,-1000) 22(100,-1000) 23(0,-1100) 24(100,-1100) 25(0,-1200) 26(100,-1200) 27(0,-1300) 28(100,-1300) 29(0,-1400) 30(100,-1400) 31(0,-1500) 32(100,-1500) 33(0,-1600) 34(100,-1600) 35(0,-1700) 36(100,-1700) 37(0,-1800) 38(100,-1800) 39(0,-1900) 40(100,-1900) 41(0,-2000) 42(100,-2000) 43(0,-2100) 44(100,-2100) 45(0,-2200) 46(100,-2200) 47(0,-2300) 48(100,-2300) 49(0,-2400) 50(100,-2400) 51(0,-2500) 52(100,-2500) 53(0,-2600) 54(100,-2600) 55(0,-2700) 56(100,-2700) 57(0,-2800) 58(100,-2800) 59(0,-2900) 60(100,-2900) 61(0,-3000) 62(100,-3000) 63(0,-3100) 64(100,-3100) 65(0,-3200) 66(100,-3200) 67(0,-3300) 68(100,-3300) 69(0,-3400) 70(100,-3400)
  silkscreen extent -50,-3450 150,50
0603 [mil]
  rect 30x30 smd: 1(-27.5,0) 2(27.5,0)
  silkscreen extent -50,-20 50,20
0603_NC [mil]
  rect 30x30 smd: 1(-27.5,0) 2(27.5,0)
  silkscreen extent -11,-10 9,10
0603P [mil]
  rect 30x30 smd: 1(-27.5,0) 2(27.5,0)
  silkscreen extent -50,-20 50,20
0603p [mil]
  rect 30x30 smd: 1(-27.5,0) 2(27.5,0)
  silkscreen extent -50,-20 50,20
0805 [mil]
  rect 50x40 smd: 1(0,40) 2(0,-40)
  silkscreen extent -35,-70 35,70
ADJRH [mil]
  round 118.11 hole 100: 0(-200,275) 0(200,275)
  round 80 hole 50: 1(-100,0) 2(0,0) 3(100,0)
  silkscreen extent -185,50 185,500
AM240*320B [mil]
  round 125.98 hole 125.98 unplated: 0(-3126.94,1.28) 0(-3126.94,1419) 0(0,0)
  round 60 hole 40: 1(-278,1464) 2(-178,1464) 3(-278,1364) 4(-178,1364) 5(-278,1264) 6(-178,1264) 7(-278,1164) 8(-178,1164) 9(-278,1064) 10(-178,1064) 11(-278,964) 12(-178,964) 13(-278,864) 14(-178,864) 15(-278,764) 16(-178,764) 17(-278,664) 18(-178,664) 19(-278,564) 20(-178,564) 21(-278,464) 22(-178,464) 23(-278,364) 24(-178,364) 25(-278,264) 26(-178,264) 27(-278,164) 28(-178,164) 29(-278,64) 30(-178,64)
  silkscreen extent -3225,-156 98,1574
BNX001 [mm]
  round 1.8 hole 1.4: 1(2.5,2.5) 2(-2.5,2.5) 3(2.5,-2.5) 4(0,0) 5(5,0) 6(-2.5,-2.5)
  silkscreen extent -5,-5 5.76,5
C160M [mil]
  rect 80x47.24 smd: 1(80,0) 2(-80,0)
  silkscreen extent -83,-83 83,83
C310M [mil]
  rect 200x120 smd paste-39.37 mask-39.37: 1(125,0) 2(-125,0)
  silkscreen extent -163,-163 163,163
D2PAK/A [mm]
  rect 2.8x1 smd: 1(11.4,-2.54) 2(11.4,0)
  rect 8x10.2 smd: 2(0,0)
  rect 2.8x1.42 smd: 3(11.4,2.54)
  silkscreen extent -4.06,-5.08 6.35,5.08
D0603 [mil]
  rect 30x30 smd: 1(0,27.5) 2(0,-27.5)
  silkscreen extent -25,-50 25,55
DB9/M [mil]
  round 50 hole 50: 0(-538,55) 0(-523,55) 0(-508,55) 0(-493,55) 0(-478,55) 0(-463,55) 0(-448,55) 0(448,55) 0(463,55) 0(478,55) 0(493,55) 0(508,55) 0(523,55) 0(538,55)
  oval 170x80 hole 50: 0(-493,55) 0(493,55)
  rect 70x80 hole 38: 1(218,0)
  oval 70x80 hole 38: 2(109,0) 3(0,0) 4(-109,0) 5(-218,0) 6(164,110) 7(55,110) 8(-54,110) 9(-163,110)
  silkscreen extent -618,-100 618,410
DC10B [mil]
  round 45 hole 30: 1(244.09,-40) 1(244.09,-20) 1(244.09,20) 1(244.09,40) 2(82.05,-196.85) 2(102.05,-196.85) 2(142.05,-196.85) 2(162.05,-196.85) 3(0,-40) 3(0,-20) 3(0,20) 3(0,40)
  oval 80x180 hole 30: 1(244.1,0) 3(0,0)
  oval 180x80 hole 30: 2(122.05,-196.85)
  silkscreen extent -175,-170 290,180
FBGA48(9*11) [mil]
  round 12 smd: A1(-73.82,103.35) A2(-44.29,103.35) A3(-14.76,103.35) A4(14.76,103.35) A5(44.29,103.35) A6(73.82,103.35) B1(-73.82,73.82) B2(-44.29,73.82) B3(-14.76,73.82) B4(14.76,73.82) B5(44.29,73.82) B6(73.82,73.82) C1(-73.82,44.29) C2(-44.29,44.29) C3(-14.76,44.29) C4(14.76,44.29) C5(44.29,44.29) C6(73.82,44.29) D1(-73.82,14.76) D2(-44.29,14.76) D3(-14.76,14.76) D4(14.76,14.76) D5(44.29,14.76) D6(73.82,14.76) E1(-73.82,-14.76) E2(-44.29,-14.76) E3(-14.76,-14.76) E4(14.76,-14.76) E5(44.29,-14.76) E6(73.82,-14.76) F1(-73.82,-44.29) F2(-44.29,-44.29) F3(-14.76,-44.29) F4(14.76,-44.29) F5(44.29,-44.29) F6(73.82,-44.29) G1(-73.82,-73.82) G2(-44.29,-73.82) G3(-14.76,-73.82) G4(14.76,-73.82) G5(44.29,-73.82) G6(73.82,-73.82) H1(-73.82,-103.35) H2(-44.29,-103.35) H3(-14.76,-103.35) H4(14.76,-103.35) H5(44.29,-103.35) H6(73.82,-103.35)
  TopLayer lines w5: -157.48,216.54 -177.17,216.54 -177.17,196.85 ; 157.48,216.54 177.17,216.54 177.17,196.85 ; -177.17,-196.85 -177.17,-216.54 -157.48,-216.54 ; 177.17,-196.85 177.17,-216.54 157.48,-216.54
  silkscreen extent -158,167 -138,187
FTSH-110-01-L-DV [mil]
  round 38 hole 38 unplated: 0(-200,0) 0(200,0)
  rect 29x110 smd: 1(-225,-80) 2(-225,80) 3(-175,-80) 4(-175,80) 5(-125,-80) 6(-125,80) 7(-75,-80) 8(-75,80) 9(-25,-80) 10(-25,80) 11(25,-80) 12(25,80) 13(75,-80) 14(75,80) 15(125,-80) 16(125,80) 17(175,-80) 18(175,80) 19(225,-80) 20(225,80)
  silkscreen extent -275,-100 275,100
IC149-144-045-B5 [mm]
  rect 1x2.5 smd rot 45: 0(-11,-11) 0(11,11)
  rect 1x2.5 smd rot 135: 0(-11,11) 0(11,-11)
  round 1.5 hole 1.5 unplated: 0(0,-8) 0(0,8)
  rect 0.22x1.6 smd: 1(-8.75,-10.9) 2(-8.25,-10.9) 3(-7.75,-10.9) 4(-7.25,-10.9) 5(-6.75,-10.9) 6(-6.25,-10.9) 7(-5.75,-10.9) 8(-5.25,-10.9) 9(-4.75,-10.9) 10(-4.25,-10.9) 11(-3.75,-10.9) 12(-3.25,-10.9) 13(-2.75,-10.9) 14(-2.25,-10.9) 15(-1.75,-10.9) 16(-1.25,-10.9) 17(-0.75,-10.9) 18(-0.25,-10.9) 19(0.25,-10.9) 20(0.75,-10.9) 21(1.25,-10.9) 22(1.75,-10.9) 23(2.25,-10.9) 24(2.75,-10.9) 25(3.25,-10.9) 26(3.75,-10.9) 27(4.25,-10.9) 28(4.75,-10.9) 29(5.25,-10.9) 30(5.75,-10.9) 31(6.25,-10.9) 32(6.75,-10.9) 33(7.25,-10.9) 34(7.75,-10.9) 35(8.25,-10.9) 36(8.75,-10.9) 73(8.75,10.9) 74(8.25,10.9) 75(7.75,10.9) 76(7.25,10.9) 77(6.75,10.9) 78(6.25,10.9) 79(5.75,10.9) 80(5.25,10.9) 81(4.75,10.9) 82(4.25,10.9) 83(3.75,10.9) 84(3.25,10.9) 85(2.75,10.9) 86(2.25,10.9) 87(1.75,10.9) 88(1.25,10.9) 89(0.75,10.9) 90(0.25,10.9) 91(-0.25,10.9) 92(-0.75,10.9) 93(-1.25,10.9) 94(-1.75,10.9) 95(-2.25,10.9) 96(-2.75,10.9) 97(-3.25,10.9) 98(-3.75,10.9) 99(-4.25,10.9) 100(-4.75,10.9) 101(-5.25,10.9) 102(-5.75,10.9) 103(-6.25,10.9) 104(-6.75,10.9) 105(-7.25,10.9) 106(-7.75,10.9) 107(-8.25,10.9) 108(-8.75,10.9)
  rect 1.6x0.22 smd: 37(10.9,-8.75) 38(10.9,-8.25) 39(10.9,-7.75) 40(10.9,-7.25) 41(10.9,-6.75) 42(10.9,-6.25) 43(10.9,-5.75) 44(10.9,-5.25) 45(10.9,-4.75) 46(10.9,-4.25) 47(10.9,-3.75) 48(10.9,-3.25) 49(10.9,-2.75) 50(10.9,-2.25) 51(10.9,-1.75) 52(10.9,-1.25) 53(10.9,-0.75) 54(10.9,-0.25) 55(10.9,0.25) 56(10.9,0.75) 57(10.9,1.25) 58(10.9,1.75) 59(10.9,2.25) 60(10.9,2.75) 61(10.9,3.25) 62(10.9,3.75) 63(10.9,4.25) 64(10.9,4.75) 65(10.9,5.25) 66(10.9,5.75) 67(10.9,6.25) 68(10.9,6.75) 69(10.9,7.25) 70(10.9,7.75) 71(10.9,8.25) 72(10.9,8.75) 109(-10.9,8.75) 110(-10.9,8.25) 111(-10.9,7.75) 112(-10.9,7.25) 113(-10.9,6.75) 114(-10.9,6.25) 115(-10.9,5.75) 116(-10.9,5.25) 117(-10.9,4.75) 118(-10.9,4.25) 119(-10.9,3.75) 120(-10.9,3.25) 121(-10.9,2.75) 122(-10.9,2.25) 123(-10.9,1.75) 124(-10.9,1.25) 125(-10.9,0.75) 126(-10.9,0.25) 127(-10.9,-0.25) 128(-10.9,-0.75) 129(-10.9,-1.25) 130(-10.9,-1.75) 131(-10.9,-2.25) 132(-10.9,-2.75) 133(-10.9,-3.25) 134(-10.9,-3.75) 135(-10.9,-4.25) 136(-10.9,-4.75) 137(-10.9,-5.25) 138(-10.9,-5.75) 139(-10.9,-6.25) 140(-10.9,-6.75) 141(-10.9,-7.25) 142(-10.9,-7.75) 143(-10.9,-8.25) 144(-10.9,-8.75)
  silkscreen extent -10.29,-10.29 10.29,10.29
IDC14S [mil]
  round 60 hole 40: 1(0,0) 2(100,0) 3(0,-100) 4(100,-100) 5(0,-200) 6(100,-200) 7(0,-300) 8(100,-300) 9(0,-400) 10(100,-400) 11(0,-500) 12(100,-500) 13(0,-600) 14(100,-600)
  silkscreen extent -125,-800 237,200
IDC20S [mil]
  round 60 hole 40: 1(0,0) 2(100,0) 3(0,-100) 4(100,-100) 5(0,-200) 6(100,-200) 7(0,-300) 8(100,-300) 9(0,-400) 10(100,-400) 11(0,-500) 12(100,-500) 13(0,-600) 14(100,-600) 15(0,-700) 16(100,-700) 17(0,-800) 18(100,-800) 19(0,-900) 20(100,-900)
  silkscreen extent -125,-1100 250,200
IDC34S [mil]
  round 60 hole 40: 1(0,0) 2(100,0) 3(0,-100) 4(100,-100) 5(0,-200) 6(100,-200) 7(0,-300) 8(100,-300) 9(0,-400) 10(100,-400) 11(0,-500) 12(100,-500) 13(0,-600) 14(100,-600) 15(0,-700) 16(100,-700) 17(0,-800) 18(100,-800) 19(0,-900) 20(100,-900) 21(0,-1000) 22(100,-1000) 23(0,-1100) 24(100,-1100) 25(0,-1200) 26(100,-1200) 27(0,-1300) 28(100,-1300) 29(0,-1400) 30(100,-1400) 31(0,-1500) 32(100,-1500) 33(0,-1600) 34(100,-1600)
  silkscreen extent -125,-1800 250,200
IR_VISHAY3 [mm]
  rect 2x0.5 smd: 1(0,0) 2(0,0.95) 3(0,1.9) 4(0,2.85) 5(0,3.8) 6(0,4.75) 7(0,5.7) 8(0,6.65)
  silkscreen extent -1.1,-1 4.17,7.5
JOY [mm]
  round 0.7 hole 0.7 unplated: 0(0,1.9)
  round 1 hole 1 unplated: 0(0,-1.9)
  rect 1.778x1.016 smd: 1(-3.1,1.4) 2(-3.1,0) 3(-3.1,-1.4) 4(3.1,-1.4) 5(3.1,0) 6(3.1,1.4)
  silkscreen extent -3.8,-3.7 3.8,4.1
JP2_SMD [mm]
  rect 0.4x0.4 smd: 1(-0.3,0) 2(0.3,0)
  silkscreen extent -0.75,-0.45 0.75,0.45
KS1508 [mil]
  round 60 hole 40: 1(-149.61,0) 2(149.61,0)
  silkscreen extent -295,-295 295,295
LCD12232-GB1 [mil]
  round 125.98 hole 125.98 unplated: 0(-3129.92,0) 0(0,0)
  round 60 hole 30: 1(-1153.94,1475) 2(-1053.94,1475) 3(-953.94,1475) 4(-853.94,1475) 5(-753.94,1475) 6(-653.94,1475) 7(-553.94,1475) 8(-453.94,1475)
  silkscreen extent -3230,-157 98,1575
LI1220_1 [mm]
  round 1.1 hole 1.1 unplated: 0(0,3.75)
  round 1.5 hole 1.5 unplated: 0(0.025,-3.75)
  oct 2.5x6 smd: 1(0,-8.6)
  oval 2.5x6 smd: 2(0,8.6)
  silkscreen extent -7.62,-7.57 7.62,7.57
MSD(PJS008) [mm]
  round 0.7 hole 0.7 unplated: 0(0,0) 0(0,7.55)
  rect 1.6x0.8 smd: 1(-5.8,1.475) 2(-5.8,2.575) 3(-5.8,3.675) 4(-5.8,4.775) 5(-5.8,5.875) 6(-5.8,6.975) 7(-5.8,8.075) 8(-5.8,9.175)
  rect 1.6x0.85 smd: 9(-5.8,10.325)
  rect 1.4x1.95 smd: 10(4.4,11.225)
  rect 3.5x1.6 smd: G1(-3.65,-3.4)
  rect 3.1x1.5 smd: G2(7.35,11.45)
  rect 3.5x1.4 smd: G3(7.35,-3.5)
  rect 3.1x1.2 smd: G4(-4.15,11.6)
  silkscreen extent -5.07,-3.81 9.28,11.43
PB10 [mil]
  rect 40x60 smd: 1(-87.5,177.17) 2(87.5,177.17) 3(87.5,-177.17) 4(-87.5,-177.17)
  silkscreen extent -125,-125 125,125
polyzen [mm]
  rect 0.8x2.21 smd: 1(0,0)
  rect 0.7x0.94 smd: 2(3.429,0.635) 3(3.429,-0.635)
  silkscreen extent -0.38,-2.03 3.68,2.03
QFN32 [mm]
  rect 2.5x2.5 smd: 0(0,0)
  rect 0.7x0.2 smd: 1(-2.4,1.75) 2(-2.4,1.25) 3(-2.4,0.75) 4(-2.4,0.25) 5(-2.4,-0.25) 6(-2.4,-0.75) 7(-2.4,-1.25) 8(-2.4,-1.75) 17(2.4,-1.75) 18(2.4,-1.25) 19(2.4,-0.75) 20(2.4,-0.25) 21(2.4,0.25) 22(2.4,0.75) 23(2.4,1.25) 24(2.4,1.75)
  rect 0.2x0.7 smd: 9(-1.75,-2.4) 10(-1.25,-2.4) 11(-0.75,-2.4) 12(-0.25,-2.4) 13(0.25,-2.4) 14(0.75,-2.4) 15(1.25,-2.4) 16(1.75,-2.4) 25(1.75,2.4) 26(1.25,2.4) 27(0.75,2.4) 28(0.25,2.4) 29(-0.25,2.4) 30(-0.75,2.4) 31(-1.25,2.4) 32(-1.75,2.4)
  silkscreen extent -2.79,-2.79 2.79,2.79
RES4B [mil]
  rect 15.75x35 smd: 1(47.24,33.5) 2(47.24,-33.5) 3(15.75,33.5) 4(15.75,-33.5) 5(-15.75,33.5) 6(-15.75,-33.5) 7(-47.24,33.5) 8(-47.24,-33.5)
  silkscreen extent -70,-28 70,28
SAM(C816) [mm]
  rect 1.5x1.3 smd: 1(-12.3,-8.255) 2(-12.3,-5.715) 3(-12.3,-3.175) 4(-12.3,-0.635) 5(12.3,-8.255) 6(12.3,-5.715) 7(12.3,-3.175) 8(12.3,-0.635)
  rect 1.75x1 smd: 17(-5.5,4.445) 18(-5.5,6.985)
  round 2 hole 2.2 unplated: G0(-10.16,22.225) G0(10.16,-22.225)
  silkscreen extent -17.15,-29.59 14.61,26.42
SIP2 [mil]
  round 60 hole 40: 1(0,0) 2(100,0)
  silkscreen extent -50,-50 150,50
SIP3 [mil]
  rect 60x60 hole 40: 1(0,0)
  round 60 hole 40: 2(100,0) 3(200,0)
  silkscreen extent -50,-50 50,50
SM8 [mm]
  rect 1.9x1.3 smd: 1(-2.75,-1.6) 2(2.75,-1.6) 3(2.75,1.6) 4(-2.75,1.6)
  silkscreen extent -4.44,-1.91 4.44,1.91
SO8 [mil]
  rect 24x76 smd: 1(0,0) 2(50,0) 3(100,0) 4(150,0) 5(150,225) 6(100,225) 7(50,225) 8(0,225)
  silkscreen extent -30,60 180,160
SO28 [mil]
  rect 75x25 smd: 1(0,0) 2(0,-50) 3(0,-100) 4(0,-150) 5(0,-200) 6(0,-250) 7(0,-300) 8(0,-350) 9(0,-400) 10(0,-450) 11(0,-500) 12(0,-550) 13(0,-600) 14(0,-650) 15(400,-650) 16(400,-600) 17(400,-550) 18(400,-500) 19(400,-450) 20(400,-400) 21(400,-350) 22(400,-300) 23(400,-250) 24(400,-200) 25(400,-150) 26(400,-100) 27(400,-50) 28(400,0)
  silkscreen extent 80,-685 320,35
SOT-23 [mil]
  rect 36x36 smd: 1(37.5,-40) 2(-37.5,-40)
  rect 36x50 smd: 3(0.5,40)
  silkscreen extent -58,-45 58,45
SOT-666 [mm]
  rect 1.16x0.279 smd: 1(-0.795,0.5) 2(-0.795,0) 3(-0.795,-0.5) 4(0.795,-0.5) 5(0.795,0) 6(0.795,0.5)
  silkscreen extent -0.82,-0.88 0.82,0.88
ST-225-02 [mm]
  round 2 hole 1.2: 1(0,0.254) 1(0,0) 1(0,-0.254) 2(2.3,1.746) 2(2.3,2.254) 3(7.8,1.746) 3(7.8,2) 3(7.8,2.235)
  round 2 hole 1.4: 2(2.3,2)
  silkscreen extent -4.41,-5 13.05,3.5
TAN-A [mil]
  rect 50x60 smd: 1(-55,0) 2(55,0)
  silkscreen extent -105,-45 95,45
TAN-B [mil]
  rect 50x100 smd: 1(-60,0) 2(60,0)
  silkscreen extent -120,-75 110,75
TBGA64(10*13) [mil]
  round 12 smd: A1(-137.8,137.8) A2(-98.43,137.8) A3(-59.06,137.8) A4(-19.69,137.8) A5(19.68,137.8) A6(59.06,137.8) A7(98.43,137.8) A8(137.8,137.8) B1(-137.8,98.43) B2(-98.43,98.43) B3(-59.06,98.43) B4(-19.69,98.43) B5(19.68,98.43) B6(59.06,98.43) B7(98.43,98.43) B8(137.8,98.43) C1(-137.8,59.06) C2(-98.43,59.06) C3(-59.06,59.06) C4(-19.69,59.06) C5(19.68,59.06) C6(59.06,59.06) C7(98.43,59.06) C8(137.8,59.06) D1(-137.8,19.69) D2(-98.43,19.69) D3(-59.06,19.69) D4(-19.68,19.68) D5(19.68,19.69) D6(59.06,19.69) D7(98.43,19.69) D8(137.8,19.69) E1(-137.8,-19.68) E2(-98.43,-19.68) E3(-59.06,-19.68) E4(-19.68,-19.68) E5(19.68,-19.68) E6(59.06,-19.68) E7(98.43,-19.68) E8(137.8,-19.68) F1(-137.8,-59.06) F2(-98.43,-59.06) F3(-59.06,-59.06) F4(-19.69,-59.06) F5(19.68,-59.06) F6(59.06,-59.06) F7(98.43,-59.06) F8(137.8,-59.06) G1(-137.8,-98.43) G2(-98.43,-98.43) G3(-59.06,-98.43) G4(-19.69,-98.43) G5(19.68,-98.43) G6(59.06,-98.43) G7(98.43,-98.43) G8(137.8,-98.43) H1(-137.8,-137.8) H2(-98.43,-137.8) H3(-59.06,-137.8) H4(-19.69,-137.8) H5(19.68,-137.8) H6(59.06,-137.8) H7(98.43,-137.8) H8(137.8,-137.8)
  TopLayer lines w5: -196.85,-255.91 -196.85,-236.22 ; -196.85,236.22 -196.85,255.91 -177.17,255.91 ; 177.17,-255.91 196.85,-255.91 196.85,-236.22 ; 177.17,255.91 196.85,255.91 196.85,236.22
  silkscreen extent -158,187 -138,207
TP [mil]
  round 60 hole 40: 1(0,0)
  silkscreen extent -45,-45 45,45
TSOP48 [mil]
  rect 40x9 smd: 1(0,0) 2(0,-19.68) 3(0,-39.37) 4(0,-59.06) 5(0,-78.74) 6(0,-98.43) 7(0,-118.11) 8(0,-137.8) 9(0,-157.48) 10(0,-177.17) 11(0,-196.85) 12(0,-216.54) 13(0,-236.22) 14(0,-255.91) 15(0,-275.59) 16(0,-295.28) 17(0,-314.96) 18(0,-334.65) 19(0,-354.33) 20(0,-374.02) 21(0,-393.7) 22(0,-413.39) 23(0,-433.07) 24(0,-452.76) 25(787.4,-452.76) 26(787.4,-433.07) 27(787.4,-413.39) 28(787.4,-393.7) 29(787.4,-374.02) 30(787.4,-354.33) 31(787.4,-334.65) 32(787.4,-314.96) 33(787.4,-295.28) 34(787.4,-275.59) 35(787.4,-255.91) 36(787.4,-236.22) 37(787.4,-216.54) 38(787.4,-196.85) 39(787.4,-177.17) 40(787.4,-157.48) 41(787.4,-137.8) 42(787.4,-118.11) 43(787.4,-98.43) 44(787.4,-78.74) 45(787.4,-59.06) 46(787.4,-39.37) 47(787.4,-19.68) 48(787.4,0)
  silkscreen extent 50,-463 738,10
TSSOP16 [mm]
  rect 1.15x0.3 smd: 1(0,0) 2(0,-0.65) 3(0,-1.3) 4(0,-1.95) 5(0,-2.6) 6(0,-3.25) 7(0,-3.9) 8(0,-4.55) 9(6.4,-4.55) 10(6.4,-3.9) 11(6.4,-3.25) 12(6.4,-2.6) 13(6.4,-1.95) 14(6.4,-1.3) 15(6.4,-0.65) 16(6.4,0)
  silkscreen extent 0.94,-4.88 5.42,0.33
USB-B [mil]
  round 120 hole 95: 0(-291,-185) 0(189,-185)
  round 50 hole 30: 1(0,0) 2(-98,0) 3(-98,-80) 4(0,-80)
  silkscreen extent -365,-488 263,57
VB334 [mm]
  round 2 hole 1.3: 1(-3.125,3.125) 2(3.125,3.125) 3(3.125,-3.125) 4(-3.125,-3.125)
  round 2.032 hole 1.27: 5(0,0)
  silkscreen extent -5.5,-5.5 5.5,5.5
VDFPN8(8*6) [mm]
  rect 2.54x4.064 smd: 0(0,0)
  rect 1x0.5 smd: 1(-3.81,1.905) 2(-3.81,0.635) 3(-3.81,-0.635) 4(-3.81,-1.905) 5(3.81,-1.905) 6(3.81,-0.635) 7(3.81,0.635) 8(3.81,1.905)
  silkscreen extent -4,-3.04 4,3.01
XTAL_socket [mil]
  round 80 hole 53: 1(100,0) 2(-100,0)
  silkscreen extent -215,-89 214,89

## Free pads (board coordinates)
  round 137.8 hole 137.8 unplated: 0(0,0) 0(0,6350) 0(4050,0) 0(4050,6350)
  round 30 smd: 0(360,100) 0(1170,4825) 0(1550,3550) 0(1700,5375) 0(2215,4880) 0(2500,4525) 0(3485,6000)

## Via types
v1: diameter 16, hole 8, TopLayer to BottomLayer, tented both sides, 621 vias